# EAGLE board STEP-CON Mk 03 - Copy (EAGLE 7.6.0)
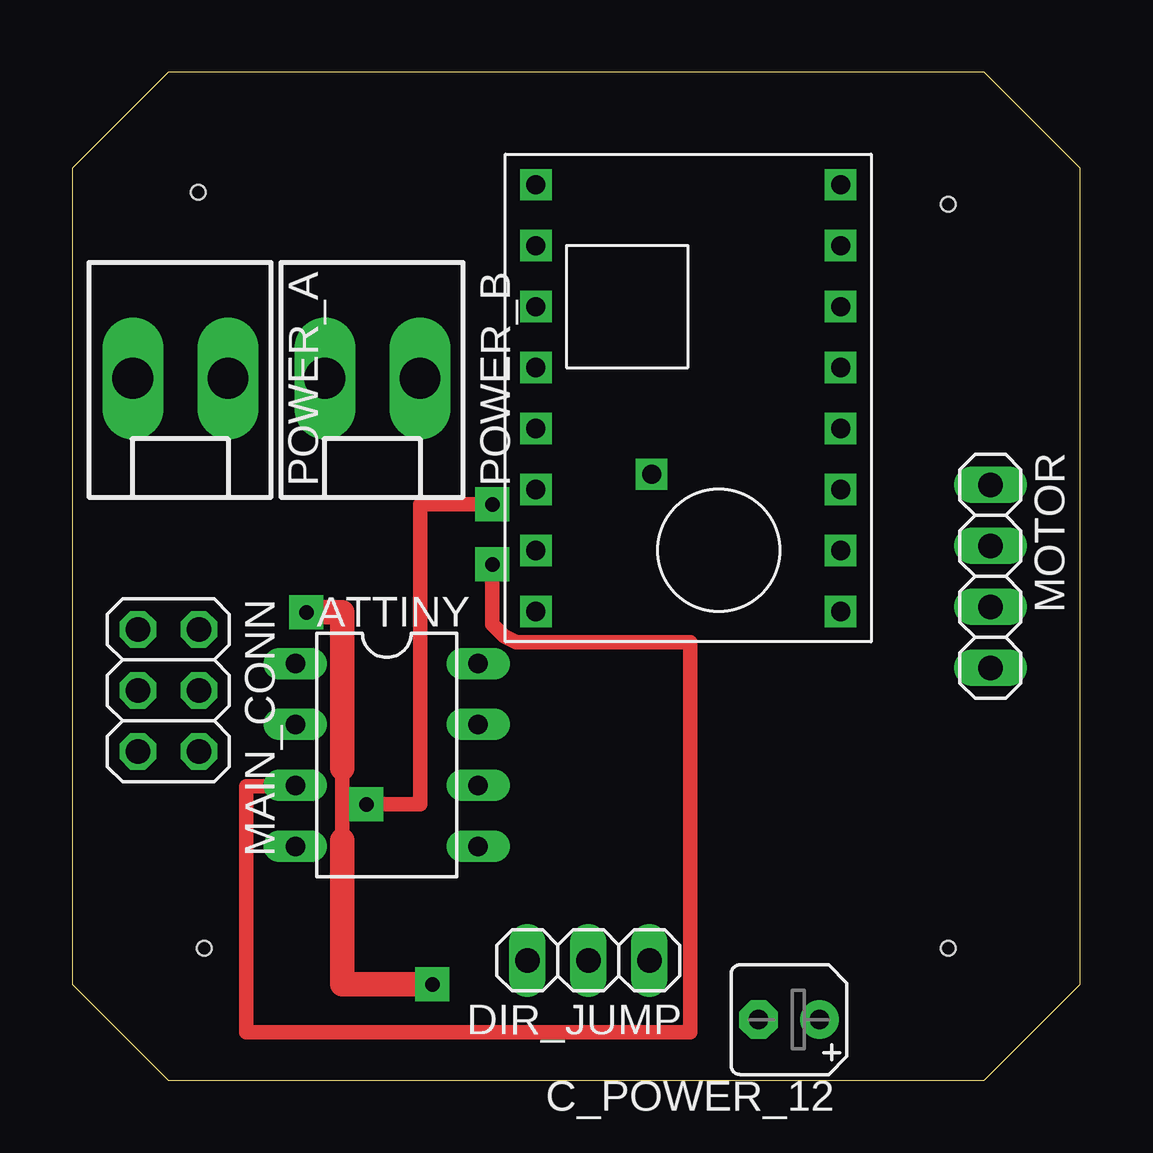
[diagram p0: board, top side]
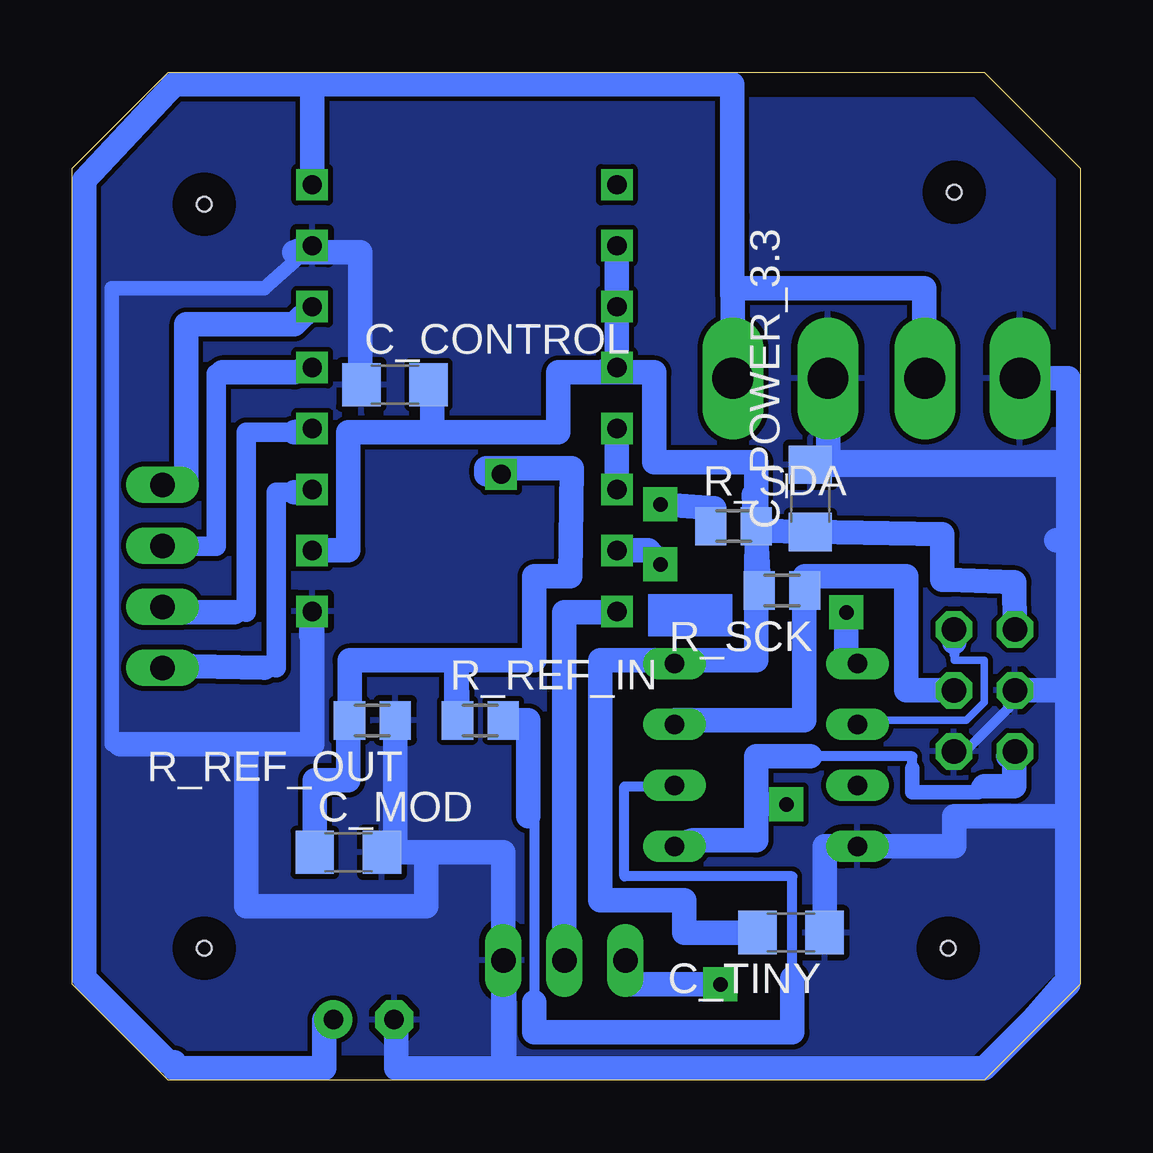
[diagram p1: board, bottom side, seen from below]

Size 42 x 42 mm. Coordinates in mm from the lower left corner, seen from the top.
Outline: 4,0 38,0 42,4 42,38 38,42 4,42 0,38 0,4 4,0
Copper layers (1*16): Top 0.035mm / dielectric 1.5mm / Bottom 0.035mm
Design rules "default": minimum track width 10mil, minimum drill 24mil, track to track 8mil, track to pad 8mil, pad to pad 8mil, via to via 8mil, smd to smd 8mil, copper to edge 40mil, drill to drill 8mil, minimum pad ring 10mil, minimum via ring 8mil, stop-mask expansion 4mil, vias tented up to drill 0mil, thermal gap 10mil
Holes 0.6 mm at 5.5,5.5 5.25,37 36.5,36.5 36.5,5.5

## Footprints (pad centres in the part's own frame; a part is rotated, then mirrored left to right if it is on the bottom)
DIL08 = drill 0.813 long: 1 -3.81,-3.81; 2 -1.27,-3.81; 3 1.27,-3.81; 4 3.81,-3.81; 5 3.81,3.81; 6 1.27,3.81; 7 -1.27,3.81; 8 -3.81,3.81
C1206 = smd 1.6 x 1.8: 1 -1.4,0; 2 1.4,0
B45181A = drill 0.813 pad 1.6: + -1.27,0 | drill 0.813 pad 1.6 octagon: - 1.27,0
1X03 = drill 1.016 long: 1 -2.54,0; 2 0,0; 3 2.54,0
2X03 = drill 1.016 octagon: 1 -2.54,-1.27; 2 -2.54,1.27; 3 0,-1.27; 4 0,1.27; 5 2.54,-1.27; 6 2.54,1.27
1X04 = drill 1.016 long: 1 -3.81,0; 2 -1.27,0; 3 1.27,0; 4 3.81,0
KK-156-2 = drill 1.7 pad 2.184 long: 1 -1.98,0; 2 1.98,0
M0805 = smd 1.3 x 1.6: 1 -0.95,0; 2 0.95,0
MD90B_MOD = drill 0.8 square: 1A 6.35,-1.27; 1B 6.35,-3.81; 2A 6.35,1.27; 2B 6.35,3.81; DIR -6.35,-8.89; EN -6.35,8.89; GND 6.35,6.35; GND(2) 6.35,-8.89; MS1 -6.35,6.35; MS2 -6.35,3.81; MS3 -6.35,1.27; REF -1.524,-3.175; RST -6.35,-1.27; SLP -6.35,-3.81; STEP -6.35,-6.35; VDD 6.35,-6.35; VMOT 6.35,8.89

## Placement (x,y rotation side)
ATTINY  [DIL08]  13.1,13.56 270 top
C_CONTROL  0.1u  [C1206]  28.56,28.99 0 bottom
C_MOD  0.1u  [C1206]  30.5,9.5 0 bottom
C_POWER_3.3  10u  [C1206]  11.25,24.25 90 bottom
C_POWER_12  100uF  [B45181A]  29.86,2.53 180 top
C_TINY  0.1u  [C1206]  12.06,6.16 180 bottom
DIR_JUMP  [1X03]  21.5,5 180 top
MAIN_CONN  [2X03]  4,16.25 270 top
MOTOR  [1X04]  38.25,21 270 top
POWER_A  [KK-156-2]  4.5,29.25 180 top
POWER_B  [KK-156-2]  12.5,29.25 180 top
R_REF_IN  47K  [M0805]  25,15 0 bottom
R_REF_OUT  7K  [M0805]  29.5,15 180 bottom
R_SCK  4K7  [M0805]  12.43,20.41 180 bottom
R_SDA  4K7  [M0805]  14.45,23.09 0 bottom
U$1  MD09B_MOD  [MD90B_MOD]  25.66,28.43 0 top

## Library data of the parts
ATTINY = ic-package
C_CONTROL C_MOD C_POWER_3.3 C_POWER_12 C_TINY R_REF_IN R_REF_OUT R_SCK R_SDA = rcl
DIR_JUMP MAIN_CONN MOTOR = pinhead
POWER_A POWER_B = con-molex; OC_FARNELL: unknown; OC_NEWARK: unknown
U$1 = pololu

## Nets
1A: MOTOR.3 U$1.1A
1B: MOTOR.4 U$1.1B
2A: MOTOR.2 U$1.2A
2B: MOTOR.1 U$1.2B
+3V3: ATTINY.8 C_CONTROL.2 C_POWER_3.3.1 C_TINY.2 MAIN_CONN.1 R_SCK.2 R_SDA.2 U$1.MS1 U$1.MS2 U$1.MS3 U$1.VDD
+12V: C_POWER_12.+ POWER_A.1 POWER_B.1 U$1.VMOT
DIR: DIR_JUMP.2 U$1.DIR
GND: ATTINY.4 C_CONTROL.1 C_MOD.2 C_POWER_3.3.2 C_POWER_12.- C_TINY.1 DIR_JUMP.1 MAIN_CONN.3 MAIN_CONN.6 POWER_A.2 POWER_B.2 R_REF_OUT.1 U$1.GND U$1.GND(2)
PWM: ATTINY.6 R_REF_IN.2
REF: C_MOD.1 R_REF_IN.1 R_REF_OUT.2 U$1.REF
RESET/DIR: ATTINY.1 DIR_JUMP.3
RST_SLP: U$1.RST U$1.SLP
SCK: ATTINY.7 MAIN_CONN.4 R_SCK.1
SDA: ATTINY.5 MAIN_CONN.5 R_SDA.1
SKYCLOCK: ATTINY.2 MAIN_CONN.2
STEP: ATTINY.3 U$1.STEP

## Tracks (layer width: path | path; a pad name or v marks a point on that pad's centre or on a via)
1A
  Bottom 0.61: 35.25,19.5 34.75,19.5
  Bottom 0.813: 34.75,19.5 34.75,27 32.76,27
  Bottom 1.016: MOTOR.3 39,19.5 35.25,19.5 | 32.76,27 U$1.1A
1B
  Bottom 0.61: 34,17.19 33.5,17.19
  Bottom 0.813: 33.5,17.19 33.5,24.5 32.76,24.5
  Bottom 1.016: MOTOR.4 37,17.25 34,17.19 | 32.76,24.5 U$1.1B
2A
  Bottom 0.61: 39,22.25 MOTOR.2
  Bottom 0.813: 35.75,29.5 36,29.45 36,22.25 39,22.25
  Bottom 1.016: U$1.2A 32.75,29.5 35.75,29.5
2B
  Bottom 1.016: MOTOR.1 37.25,24.81 | 37.25,24.81 38.25,24.75 | 37.25,24.81 37.25,31.5 32.76,31.5 U$1.2B
+3V3
  Bottom 1.016: U$1.VDD 30.5,22.08 30.5,27 27,27 | 27,27 21.75,27 21.75,29.5 20.06,29.5 | C_CONTROL.2 27,28.99 27,27 | U$1.MS1 U$1.MS2 U$1.MS3 20.06,29.5 | MAIN_CONN.1 2.75,20.75 5.5,20.85 5.75,20.85 5.75,22.75 C_POWER_3.3.1 13.5,22.9 | 13.5,22.9 R_SDA.2 13.5,25.75 17.75,25.75 17.75,29.5 20.06,29.5 | 13.5,22.9 13.62,24.4 R_SCK.2 13.5,21.84 13.5,17.5 16.16,17.5 | C_TINY.2 16.5,6.16 16.5,7.5 20,7.5 20,17.5 16.16,17.5 | 16.16,17.5 ATTINY.8
+12V
  Bottom 1.016: 32.01,41.5 14.5,41.5 14.5,36 POWER_B.1 14.48,33 6.5,33 6.5,30.9 POWER_A.1 | 32.01,41.5 U$1.VMOT | C_POWER_12.+ 31.5,2.53 31.5,0.5 37.75,0.5 37.75,0.75 38,0.75 41.5,4.25 41.5,37.5 37.75,41.5 32.01,41.5
DIR
  Bottom 1.016: DIR_JUMP.2 21.5,19.5 20.06,19.5 U$1.DIR
GND
  Bottom 0.406: MAIN_CONN.6 5,13.71 4.75,13.75 3,15.5 3,16.25 2.75,16.25
  Bottom 0.61: 40,14 40.35,14 40.35,33 34.01,33 U$1.GND | U$1.GND(2) 32.25,19.54 32.25,18.5 32,18.5 | 32,18.5 32,15.5 | 32,19.5 32,18.5 | 34.75,14 35,14 35,13.75 | U$1.GND(2) 32,14 | 27.25,9.5 24,9.5 24,4.75 24.25,4.75 24.25,0.5 4,0.5 0.75,4.25 0.75,16.25
  Bottom 1.016: 0.5,25.75 0.5,29.25 POWER_A.2 | 0.5,25.75 0.5,25.65 | 0.5,25.65 0.5,22.5 | 0.5,22.5 0.5,16.25 | 0.5,16.25 0.5,11 | 0.5,11 5.25,11 5.25,9.75 ATTINY.4 10.66,9.75 C_TINY.1 | 24,0.5 24,4.75 24,5 DIR_JUMP.1 24.04,9.5 27.25,9.5 | 24,0.5 4,0.5 0.5,4 0.5,11 | C_CONTROL.1 30,28.99 30,34.5 32.76,34.5 U$1.GND | 0.5,22.5 1,22.5 | U$1.GND(2) 32,18.54 32,15.5 32,14 34.75,14 | 28.55,9.5 27.25,9.5 | C_MOD.2 28.55,9.5 | 28.55,9.5 R_REF_OUT.1 | C_POWER_3.3.2 0.5,25.65 | MAIN_CONN.6 5.25,13.71 | 2.75,16.25 MAIN_CONN.3 0.75,16.25 0.5,16.25 | POWER_B.2 10.5,29.25 10.5,25.75 0.5,25.75 | 34.75,14 34.75,7.25 27.25,7.25 27.25,9.5 | C_POWER_12.- 28.5,2.53 28.5,0.5 24.25,0.5 24,0.5 | 34.75,14 40,14
  pour Bottom: 0,4 4,-0.25 38,0 42,4.25 42,37.5 37.75,42 4.25,42 0,38
PWM
  Bottom 0.406: 23,11 22.75,11 22.75,3.25 | 12,4.25 12,8.5 19,8.5 19,12.25 16.16,12.25 ATTINY.6
  Bottom 1.016: R_REF_IN.2 23,15 23,11 | 22.75,3.25 22.75,2 12,2 12,4.25
REF
  Bottom 1.016: U$1.REF 24.75,25.25 24.75,25.5 21.2,25.5 21.25,21 22.75,21 22.75,17.5 26,17.5 | 26,17.5 R_REF_IN.1 26,15 26,17.5 | 26,17.5 30.45,17.5 R_REF_OUT.2 30.5,15 30.5,12.5 31.9,12.5 C_MOD.1
RESET/DIR  (via drill 0.6 pad 1.42)
  Top 0.61: 11.25,13 11.25,10
  Top 1.016: v9.75,19.5 11.25,19.5 11.25,13 | 11.25,10 11.25,4 v15,4
  Bottom 1.016: ATTINY.1 9.75,17.37 v9.75,19.5 | v15,4 18.96,4 DIR_JUMP.3
RST_SLP
  Bottom 1.016: U$1.RST U$1.SLP
SCK
  Bottom 1.016: MAIN_CONN.4 7.25,16.25 7.25,21 11.48,21 R_SCK.1 11.5,20.41 11.5,15 16.91,15 ATTINY.7
SDA  (via drill 0.6 pad 1.42)
  Top 0.61: v17.5,24 14.5,24 14.5,11.5 v12.25,11.5
  Bottom 0.406: 11.25,13.5 7,13.5 7,13
  Bottom 0.61: 4,12.25 4.25,12.25 4.25,12 7,12 7,13
  Bottom 1.016: MAIN_CONN.5 3,13.5 2.75,13.5 2.75,12.25 4,12.25 | 11.25,13.5 13.5,13.5 13.5,11.5 | 13.5,11.5 13.5,10 16.16,10 ATTINY.5 | v12.25,11.5 13.5,11.5 | R_SDA.1 15.25,23.84 v17.5,24
SKYCLOCK
  Bottom 0.305: 5.25,17.75 5.25,17.5 4,17.5 4,15.75 4.75,15 9.29,15 ATTINY.2
  Bottom 0.406: 5.25,18.25 5.25,17.75
  Bottom 1.016: MAIN_CONN.2 5.25,18.79 5.25,18.25
STEP  (via drill 0.6 pad 1.42)
  Top 0.61: v17.5,21.5 17.5,19 18,18.5 18.5,18.25 25.75,18.25 25.75,2 7.25,2 7.25,12.25 8.54,12.25
  Top 1.016: 8.54,12.25 ATTINY.3
  Bottom 1.016: U$1.STEP 18,22.08 v17.5,21.5
(copper drawn outside any net)
  shapes: Bottom area x1